# Altium PCB Sensors.PcbDoc
Units mil, origin at the board's own origin, x right, y up, seen from the top; angles counter-clockwise.
Board outline 1830 x 3325 mil, 2 copper layers (Top Layer, Bottom Layer); 23 components, 16 nets, 50 pads, 0 vias.
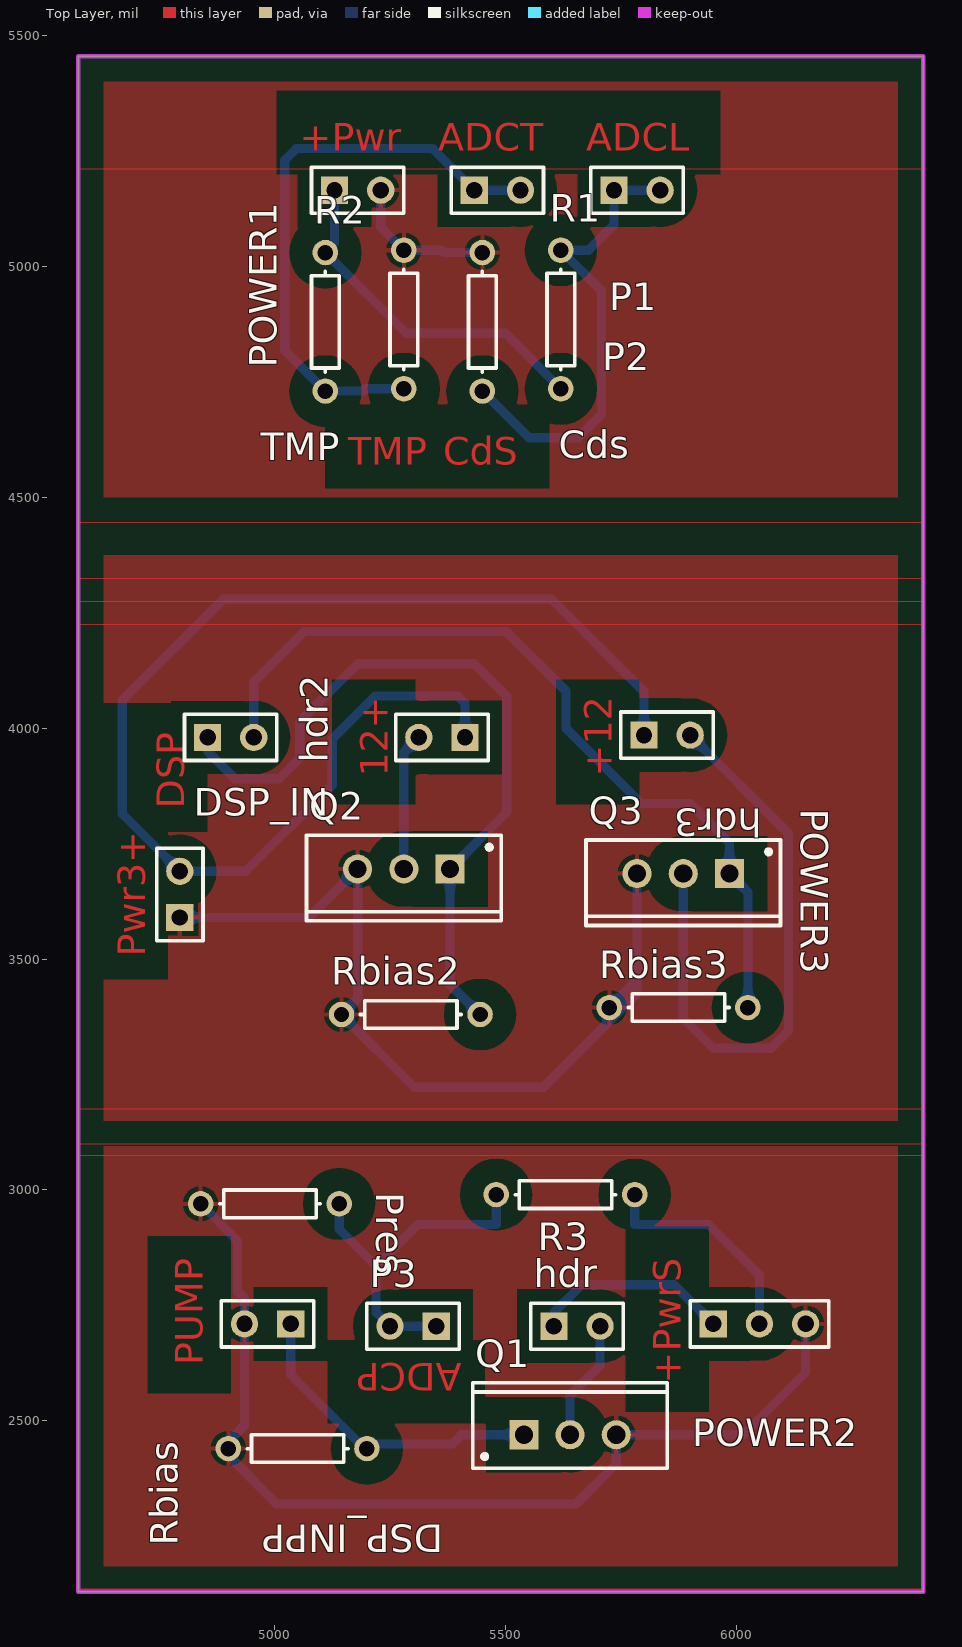
[diagram p0: Top Layer view]
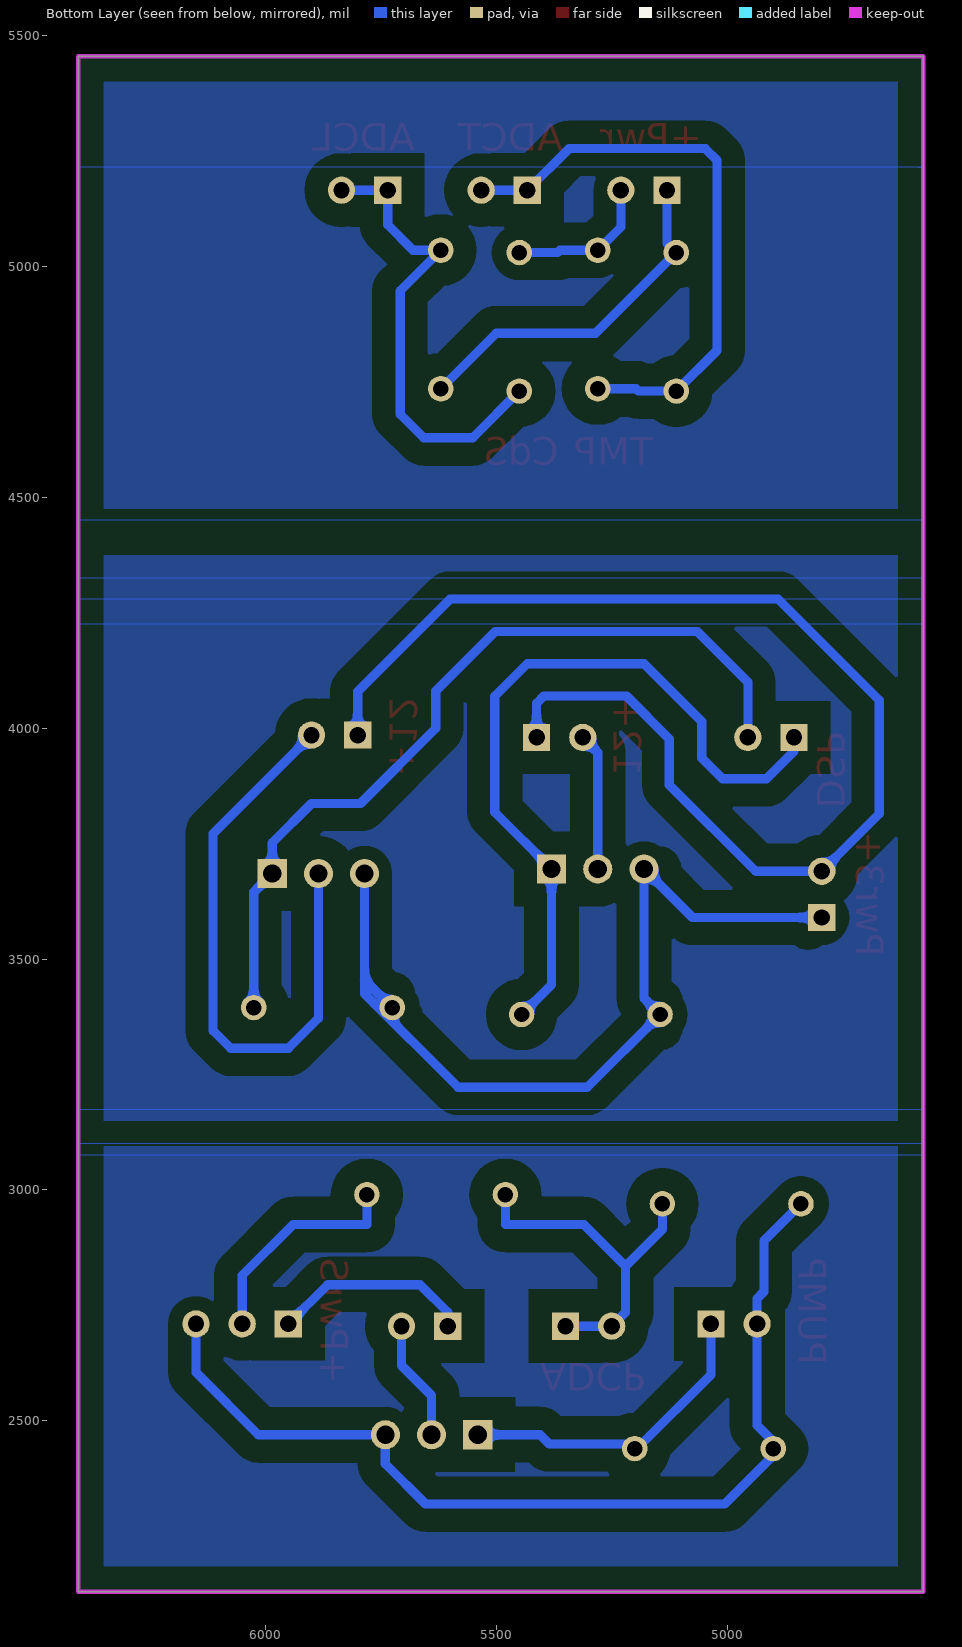
[diagram p1: Bottom Layer view, seen from below]

## Layer stack, top to bottom
Top Solder: solder mask 0.4, Solder Resist, Dk 3.5
Top Layer: signal copper 1.4
Dielectric 1: dielectric 12.6, FR-4, Dk 4.8
Bottom Layer: signal copper 1.4
Bottom Solder: solder mask 0.4, Solder Resist, Dk 3.5

## Board outline
4575,2130 6405,2130 6405,5455 4575,5455

## Design rules (kind name [scope] priority, off if disabled: settings)
Clearance [All] p1: gap=50
PolygonConnect [All] p1: connectstyle=Relief reliefconductorwidth=10 reliefentries=4 polygonreliefangle="90 Angle" airgapwidth=10
RoutingLayers [All] p1: top layer_v5=FALSE bottom layer_v5=TRUE
RoutingVias [All] p1: holewidth=28 width=50 viastyle="Through Hole" minholewidth=28 minwidth=50 maxholewidth=28 maxwidth=50
SolderMaskExpansion [All] p1: expansion=4
Width [All] p1: maxlimit=20 minlimit=20 preferedwidth=20 minimp=50.000000 maximp=50.000000 favimp=50.000000
29 further rules are at their usual default settings.

## Components (designator, comment, footprint, x,y, rotation, side; value= is the part's Value field where it differs from the comment)
Cds "Cd" AXIAL-0.3 5450,4880 r270 top
DSP_IN "Header 2" HDR1X2 4855,3980 r0 top
DSP_INPP "Header 2" HDR1X2 5035,2710 r180 top
hdr "PUMP" HDR1X2 5605,2705 r0 top
hdr2 "FAN" HDR1X2 5412.5,3980 r180 top
hdr3 "LED" HDR1X2 5800,3985 r0 top
P1 "ADC_LIGHT" HDR1X2 5735,5165 r0 top
P2 "ADC_TEMP" HDR1X2 5432.5,5165 r0 top
P3 "ADC_PRESSURE" HDR1X2 5350,2705 r180 top
POWER1 "Header 2" HDR1X2 5130,5165 r0 top
POWER2 "Header 3" HDR1X3 5950,2710 r0 top
POWER3 "Header 2" HDR1X2 4795,3590 r90 top
Pres "Psens" AXIAL-0.3 4990,2970 r0 top
Q1 "NMOS-2" TO-220AB 5640,2470 r0 top
Q2 "NMOS-2" TO-220AB 5280,3695 r180 top
Q3 "NMOS-2" TO-220AB 5885,3685 r180 top
R1 "Res2" AXIAL-0.3 5620,4885 r270 top
R2 "Res2" AXIAL-0.3 5110,4880 r90 top
R3 "Res2" AXIAL-0.3 5630,2990 r0 top
Rbias "Res1" AXIAL-0.3 5050,2440 r0 top
Rbias2 "Res1" AXIAL-0.3 5295,3380 r0 top
Rbias3 "Res1" AXIAL-0.3 5875,3395 r0 top
TMP "TR" AXIAL-0.3 5280,4885 r270 top

## Footprints (in the part's own frame and the unit in brackets; to place one, negate y for a bottom-side part, rotate by r counter-clockwise, add the part's x,y. Pads: shape width x height; smd on the part's side, far side on the other; paste and mask are expansions set on the pad)
AXIAL-0.3 [mm] "Axial Device, Thru-Hole; 2 Leads; 0.3 in Pin Spacing"
  round 1.4 hole 0.85: 1(-3.81,0) 2(3.81,0)
  silkscreen extent -2.77,-0.76 2.77,0.76
HDR1X2 [mm] "Connector; Header; 2 Position"
  rect 1.5x1.5 hole 0.9: 1(0,0)
  round 1.5 hole 0.9: 2(2.54,0)
  silkscreen extent -1.27,-1.27 3.81,1.27
HDR1X3 [mm] "Connector; Header; 3 Position"
  rect 1.5x1.5 hole 0.9: 1(0,0)
  round 1.5 hole 0.9: 2(2.54,0) 3(5.08,0)
  silkscreen extent -1.27,-1.27 6.35,1.27
TO-220AB [mm] "TO, Thru-Hole, Vertical, Heatsink Mounted; 3 In-Line Leads; Pitch 2.54 mm"
  rect 1.6x1.6 hole 1: 1(-2.54,0)
  round 1.6 hole 1: 2(0,0) 3(2.54,0)
  silkscreen extent -5.35,-1.85 5.35,2.85, body extent -5.4,-1.9 5.4,2.9, height 19.3

## Part data
Cds Pres R1 R2 R3 TMP: library part Res1, "Resistor"
DSP_IN DSP_INPP POWER1 POWER3: "Header, 2-Pin"
hdr hdr2 hdr3 P1 P2 P3: library part "Header 2", "Header, 2-Pin"
POWER2: "Header, 3-Pin"
Q1 Q2 Q3: "N-Channel Power MOSFET"
Rbias Rbias2 Rbias3: "Resistor"

## Nets (pads, with @x,y where several pads share a name; then routed paths per layer and width w, separated by ;. In a path a pad name is that pad's centre, name@x,y a point inside that pad or via, vN(x,y) a via of type N, cw(c..) or ccw(c..) an arc to the next point about the centre after c; other vN are vias at no path point)
3.3VLT: POWER1.1 R1.2 R2.2 | length 775.5
  Bottom Layer w20: POWER1.1 5130,5050 R2.2 5285,4855 5500,4855 R1.2
3.3VPP: POWER2.2 R3.2 | length 485.6
  Bottom Layer w20: R3.2 5780,2925 5940,2925 6050,2815 POWER2.2
12VFL: hdr2.1 hdr3.1 POWER3.2 | length 2733.1
  Bottom Layer w20: hdr2.1 5412.5,4054 5396.97,4069.53 5218,4069.53 5125,3976.53 5125,3877 4938,3690 POWER3.2 4670.47,3814.53 4670.47,4060.47 4889.53,4279.53 5600,4279.53 5800,4079.53 hdr3.1
12VPP: hdr.1 POWER2.1 | length 435.1
  Bottom Layer w20: hdr.1 5605,2735 5665,2795 5865,2795 POWER2.1
GNDFL: POWER3.1 Q2.3 Q3.3 Rbias2.1 Rbias3.1 | length 1892
  Bottom Layer w20: POWER3.1 5075,3590 Q2.3 5180,3415 Rbias2.1 5302.56,3222.44 5582.44,3222.44 5785,3425 5785,3455 ; Rbias3.1 5785,3455 ; Q3.3 5785,3455
GNDLT: Cds.1 POWER1.2 TMP.1 | length 322.8
  Bottom Layer w20: POWER1.2 5230,5085 TMP.1 5362,5035 5367,5030 Cds.1
GNDPP: DSP_INPP.2 POWER2.3 Pres.1 Q1.3 Rbias.1 | length 2164.7
  Bottom Layer w20: Pres.1 4920,2890 4920,2780 4935,2765 DSP_INPP.2 4935,2490 4885,2440 5005,2320 5653,2320 5740,2407 Q1.3 6015,2470 6150,2605 POWER2.3
Nethdr2_2: hdr2.2 Q2.2 | length 298.5
  Bottom Layer w20: Q2.2 5280,3947.5 hdr2.2
Nethdr3_2: hdr3.2 Q3.2 | length 1311.9
  Bottom Layer w20: Q3.2 5885,3372 5950,3307 6075,3307 6113,3345 6113,3772 hdr3.2
Nethdr_2: hdr.2 Q1.2 | length 261.9
  Bottom Layer w20: Q1.2 5640,2555 5705,2620 hdr.2
PWM_FAN: DSP_IN.1 Q2.1 Rbias2.2 | length 1648.2
  Bottom Layer w20: DSP_IN.1 4855,3950 4914.53,3890.47 5010,3890.47 5054.76,3935.24 5054.76,4014.29 5180,4139.53 5432.47,4139.53 5503,4069 5503,3818 Q2.1 5380,3445 Rbias2.2
PWM_LED: DSP_IN.2 Q3.1 Rbias3.2 | length 1805.6
  Bottom Layer w20: DSP_IN.2 4955,4100 5064.53,4209.53 5502,4209.53 5631,4080.53 5631,4000 5794,3837 5900,3837 5985,3752 Q3.1 6025,3645 Rbias3.2
PWM_PUMP: DSP_INPP.1 Q1.1 Rbias.2 | length 681.6
  Bottom Layer w20: DSP_INPP.1 5035,2600 Rbias.2@5190,2445 ; Rbias.2 5210,2450 5385,2450 5405,2470 Q1.1
V1: P3.1 P3.2 Pres.2 R3.1 | length 772.8
  Bottom Layer w20: Pres.2 5140,2915 5220,2835 ; P3.1 P3.2 5220,2735 5220,2835 ; R3.1 5480,2925 5310,2925 5220,2835
V2: Cds.2 P1.1 P1.2 R1.1 | length 1025.2
  Bottom Layer w20: Cds.2 5551,4629 5657,4629 5708,4680 5708,4947 R1.1 5680,5035 5735,5090 P1.1 P1.2
V3: P2.1 P2.2 R2.1 TMP.2 | length 1266.7
  Bottom Layer w20: TMP.2 5197,4735 5192,4730 R2.1 5022,4818 5022,5230 5047,5255 5342.5,5255 P2.1 P2.2

## Polygon pours and split planes (outlines as drawn)
GNDPP on Top Layer "Bottom Layer-No Net" (solid, pour order 32): 4575,3095 6400,3095 6405,3100 6405,2130 4575,2130 4575,3095
GNDFL on Top Layer "Bottom Layer-No Net" (solid, pour order 28): 4575,4375 6405,4375 6405,3150 4600,3150 4575,3175 4575,3145 4575,4370 4575,4375
GNDLT on Top Layer "Bottom Layer-No Net" (solid, pour order 24): 4575,5455 6405,5455 6405,4500 4575,4500 4575,5455
GNDPP on Top Layer "Bottom Layer-No Net" (solid, shelved, pour order 20): 4575,3075 6405,3075 6405,2130 4575,2130 4575,3075
GNDFL on Top Layer "Bottom Layer-No Net" (solid, shelved, pour order 18): 4575,4325 6405,4325 6405,3175 4575,3175 4575,4325
GNDLT on Top Layer "Bottom Layer-No Net" (solid, shelved, pour order 14): 4575,5455 6405,5455 6405,4450 6400,4445 4575,4445 4575,5455
no net on Top Layer "Bottom Layer-No Net" (solid, shelved, pour order 0): 4575,5215 4575,4275 6405,4275 6405,5210 4580,5210 4575,5215
no net on Top Layer "Bottom Layer-No Net" (solid, shelved, pour order 6): 4575,4225 6405,4225 6405,3175 4575,3175 4575,4230 4575,4225
no net on Top Layer "Bottom Layer-No Net" (solid, shelved, pour order 10): 4575,3100 6405,3100 6405,2130 6400,2135 4575,2135 4575,3100
GNDPP on Bottom Layer "Bottom Layer-No Net" (solid, pour order 34): 4575,3095 6405,3095 6405,2130 4575,2130 4575,3095
GNDFL on Bottom Layer "Bottom Layer-No Net" (solid, pour order 30): 4575,4375 6405,4375 6405,3150 4575,3150 4575,4380 4575,4375
GNDLT on Bottom Layer "Bottom Layer-No Net" (solid, pour order 26): 4575,5455 6405,5455 6405,4475 4575,4475 4575,5455
GNDPP on Bottom Layer "Bottom Layer-No Net" (solid, shelved, pour order 22): 4575,3075 6405,3075 6405,2130 4575,2130 4575,3075
GNDFL on Bottom Layer "Bottom Layer-No Net" (solid, shelved, pour order 16): 4575,4325 6405,4325 6405,3170 6400,3175 4575,3175 4575,4325
GNDLT on Bottom Layer "Bottom Layer-No Net" (solid, shelved, pour order 12): 4575,5455 4575,4450 6405,4450 6405,5455 4575,5455
no net on Bottom Layer "Bottom Layer-No Net" (solid, shelved, pour order 2): 4575,5215 6405,5215 6405,4280 4580,4280 4575,4285 4575,5215 4585,5215
no net on Bottom Layer "Bottom Layer-No Net" (solid, shelved, pour order 4): 4575,4225 6405,4225 6405,3175 4575,3175 4575,4225
no net on Bottom Layer "Bottom Layer-No Net" (solid, shelved, pour order 8): 4575,3100 6405,3100 6405,2130 4575,2130 4575,3100

## Keep-outs
Keep-Out Layer:
  the board outline again, w10

## Other copper
Top Layer:
  text "+Pwr" at 5055,5250 h60
  text "ADCT" at 5355,5250 h60
  text "ADCL" at 5675,5250 h60
  text "TMP" at 5160,4570 h60
  text "CdS" at 5365,4570 h60
  text "12+" at 5245,3895 h60 r90
  text "+12" at 5730,3895 h60 r90
  text "DSP" at 4805,3825 h60 r90
  text "Pwr3+" at 4720,3505 h60 r90
  text "ADCP" at 5405,2625 h60 r180
  text "PUMP" at 4845,2620 h60 r90
  text "+PwrS" at 5880,2580 h60 r90